# Altium PCB Super Mini-ESP32C3-外形.PcbDoc
Units mil, origin at the board's own origin, x right, y up, seen from the top; angles counter-clockwise.
Board outline 705.98 x 886.65 mil, 2 copper layers (Top Layer, Bottom Layer), stack 21 mil thick; 2 components, 37 nets, 16 pads, 0 vias.
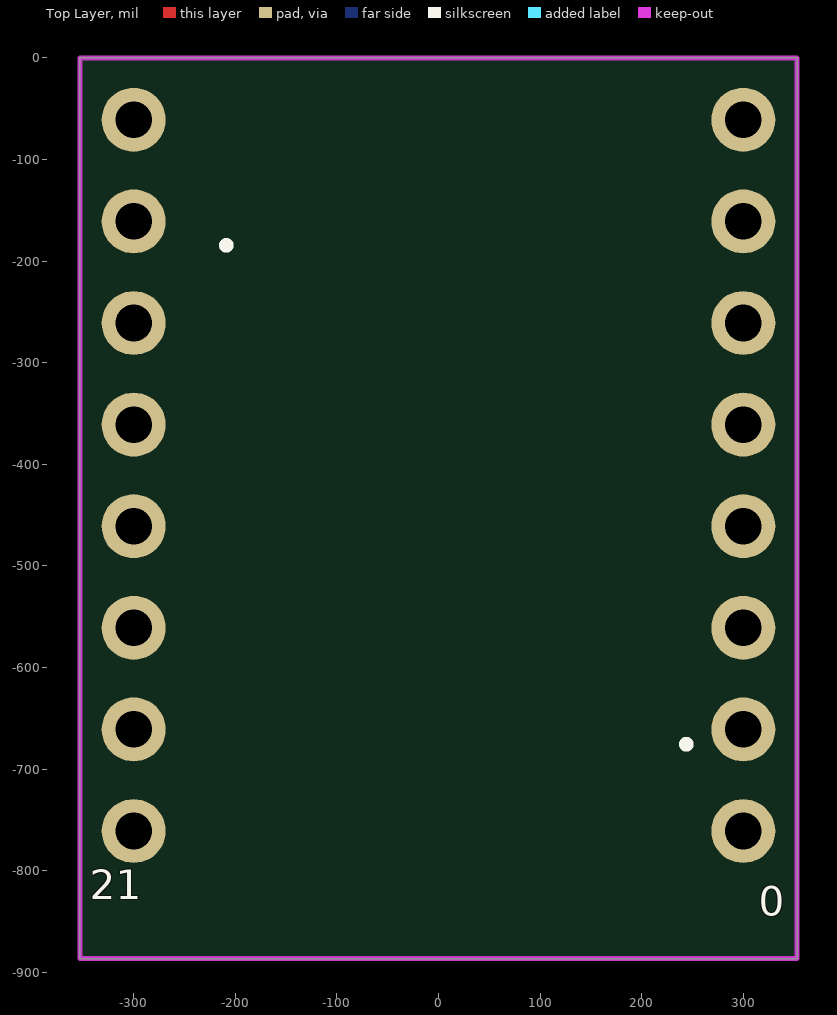
[diagram p0: Top Layer view]
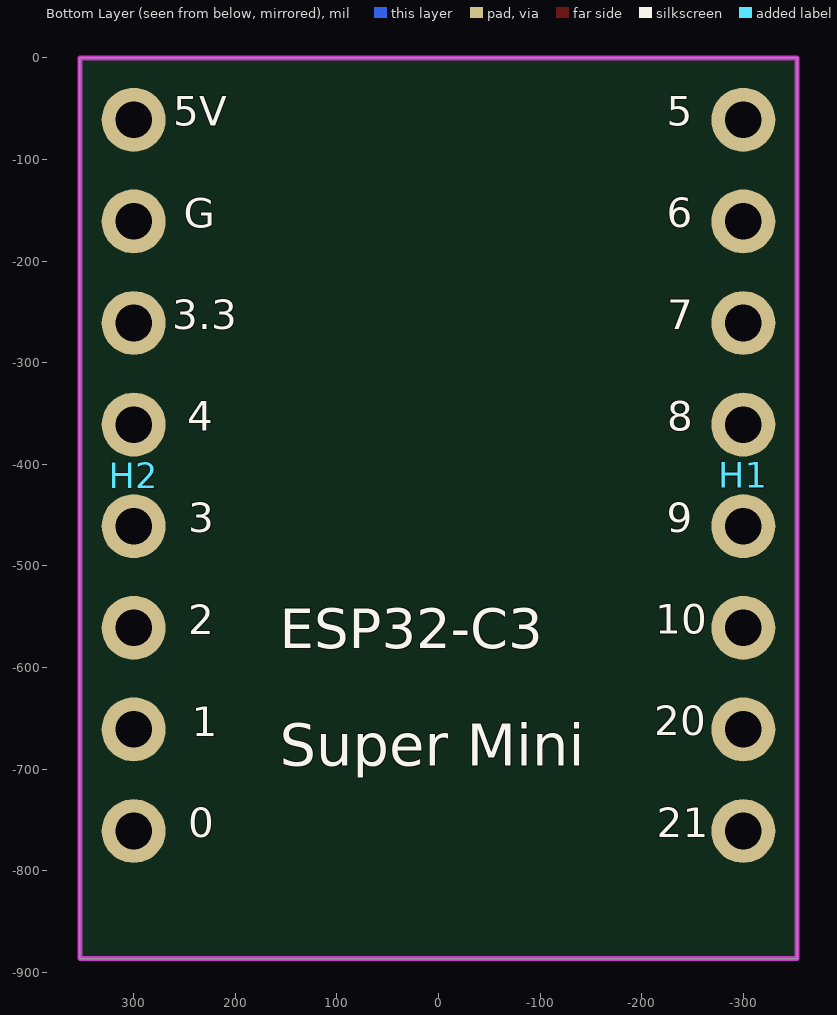
[diagram p1: Bottom Layer view, seen from below]

## Layer stack, top to bottom
Top Solder: solder mask 0.4, Solder Resist, Dk 3.5
Top Layer: signal copper 1.4
Dielectric 1: prepreg 2.8, PP-006, Dk 4.1
Dielectric1: dielectric 12.6, FR-4, Dk 4.8
Dielectric 2: prepreg 2.8, PP-006, Dk 4.1
Bottom Layer: signal copper 1.4
Bottom Solder: solder mask 0.4, Solder Resist, Dk 3.5

## Board outline
-352.99,-886.65 -352.99,0 352.99,0 352.99,-886.65

## Design rules (kind name [scope] priority, off if disabled: settings)
Clearance Clearance_2 [InPolygon] p1: gap=15 ignorepadtopadclearanceinfootprint=FALSE
Clearance Clearance_1 [OnLayer('Keep-Out Layer')] p2: gap=10 ignorepadtopadclearanceinfootprint=FALSE except(0: Arc-Hole Track-Hole SMDPad-Hole THPad-Hole Via-Hole Fill-Hole Poly-Hole Region-Hole Text-Hole)
Clearance [All] p3: gap=6 ignorepadtopadclearanceinfootprint=FALSE except(0: Arc-Hole Track-Hole SMDPad-Hole THPad-Hole Via-Hole Fill-Hole Poly-Hole Region-Hole Text-Hole)
ComponentClearance [All] p1: gap=0 collisioncheckmode=3 verticalgap=0 showdistances=FALSE
HoleSize [All] p1: absolutevalues=TRUE maxlimit=200 minlimit=1 maxpercent=80.000 minpercent=20.000
HoleToHoleClearance [All] p1: gap=0 allowstackedmicrovias=TRUE
MinimumSolderMaskSliver [All] p1: minsoldermaskwidth=0.39
PolygonConnect PolygonConnect_1 [ViaSize] p1: connectstyle=Direct reliefconductorwidth=10 reliefentries=4 polygonreliefangle="90 Angle" airgapwidth=10
PolygonConnect [All] p2: connectstyle=Relief reliefconductorwidth=10 reliefentries=4 polygonreliefangle="90 Angle" airgapwidth=10
RoutingVias [All] p1: holewidth=9.84 width=19.68 viastyle="Through Hole" minholewidth=7.87 minwidth=17.72 maxholewidth=196.85 maxwidth=236.22
SilkToSilkClearance [All] p1: silktosilkclearance=0
SilkToSolderMaskClearance [IsPad] p1: minsilkscreentomaskgap=0 clearancetoexposedcopper=TRUE
SolderMaskExpansion [All] p1: expansion=4 istentingtop=FALSE
Width [All] p1: maxlimit=60 minlimit=6 preferedwidth=20
24 further rules are at their usual default settings.

## Components (designator, comment, footprint, x,y, rotation, side; value= is the part's Value field where it differs from the comment)
H1 "Header 8" "1X8 PICO HEADER" -300,-60.98 r270 bottom
H2 "Header 8" "1X8 PICO HEADER" 300,-761 r90 bottom

## Footprints (in the part's own frame and the unit in brackets; to place one, negate y for a bottom-side part, rotate by r counter-clockwise, add the part's x,y. Pads: shape width x height; smd on the part's side, far side on the other; paste and mask are expansions set on the pad)
"1X8 PICO HEADER" [mm]
  round 1.6 hole 0.914: 1(0,0) 2(2.54,0) 3(5.08,0) 4(7.62,0) 5(10.16,0) 6(12.7,0) 7(15.24,0) 8(17.78,0)

## Nets (pads, with @x,y where several pads share a name; then routed paths per layer and width w, separated by ;. In a path a pad name is that pad's centre, name@x,y a point inside that pad or via, vN(x,y) a via of type N, cw(c..) or ccw(c..) an arc to the next point about the centre after c; other vN are vias at no path point)
3.3V: H2.6
CC1: 
CC2: 
CHIP_EN: 
D+: 
D-: 
GND: H2.7
GPIO0/U1TXD: H2.1
GPIO1/U1RXD: H2.2
GPIO2: H2.3
GPIO3: H2.4
GPIO4/ADC1/SDA: H2.5
GPIO5/ADC2/SCL: H1.1
GPIO6: H1.2
GPIO7: H1.3
GPIO8/PWM: H1.4
GPIO9/BOOT: H1.5
GPIO10: H1.6
GPIO20: H1.7
GPIO21: H1.8
NetA1_1: 
NetCD1_1: 
NetCD2_1: 
NetESP-U1_1: 
SPICLK: 
SPICSO: 
SPID: 
SPIHD/GPIO12: 
SPIQ: 
SPIWP/GPIO13: 
USBD_N: 
USBD_P: 
VBUS: H2.8
VDD_SPI/GPIO11: 
VSYS: 
XTAL_N: 
XTAL_P: 

## Keep-outs
Keep-Out Layer:
  the board outline again, w5

## Other copper
Top Layer:
  pour cut-out: -352.1,-760 352.99,-760 352.99,-886.65 -351.95,-886.65
Bottom Layer:
  pour cut-out: -352.1,-760 352.99,-760 352.99,-886.65 -351.95,-886.65

## Silkscreen, mask and mechanical layers (free items; w line width, h text height)
Top Overlay:
  lines w10: -206.73,-183.71 ccw(c-208.81,-184.54) -206.69,-183.83 ; 241.9,-676.31 cw(c244.02,-675.61) 241.94,-676.44
  text "0" at 315,-805.55 h50 r180
  text "21" at -343,-838 h50
Bottom Overlay:
  text "5" at -224.78,-76.75 h50
  text "5V" at 261,-76.69 h50
  text "6" at -224.85,-176.49 h50
  text "G" at 250.65,-176.97 h50
  text "7" at -225.04,-277.04 h50
  text "3.3" at 261.93,-276.77 h50
  text "8" at -225.01,-376.78 h50
  text "4" at 247.19,-377.04 h50
  text "9" at -224.85,-476.78 h50
  text "3" at 246.32,-476.77 h50
  text "10" at -213.55,-576.77 h50
  text "2" at 246.44,-577.32 h50
  text "ESP32-C3" at 156.36,-594.06 h66.93
  text "20" at -212.34,-676.77 h50
  text "1" at 242.72,-677.33 h50
  text "Super Mini" at 156.36,-710.62 h70.87
  text "21" at -214.87,-776.78 h50
  text "0" at 246.08,-776.78 h50